# Altium PCB Ad_Fpga.PcbDoc (part 7 of 8)
Units mil, origin at the board's own origin, x right, y up, seen from the top; angles counter-clockwise.
Board outline 5995 x 3921.26 mil, 6 copper layers (Top Layer, GND, Mid-Layer 1, Mid-Layer 2, VCC, Bottom Layer); 476 components, 538 nets, 2139 pads, 1047 vias.
Unrouted connection lines stored in the file: 2.
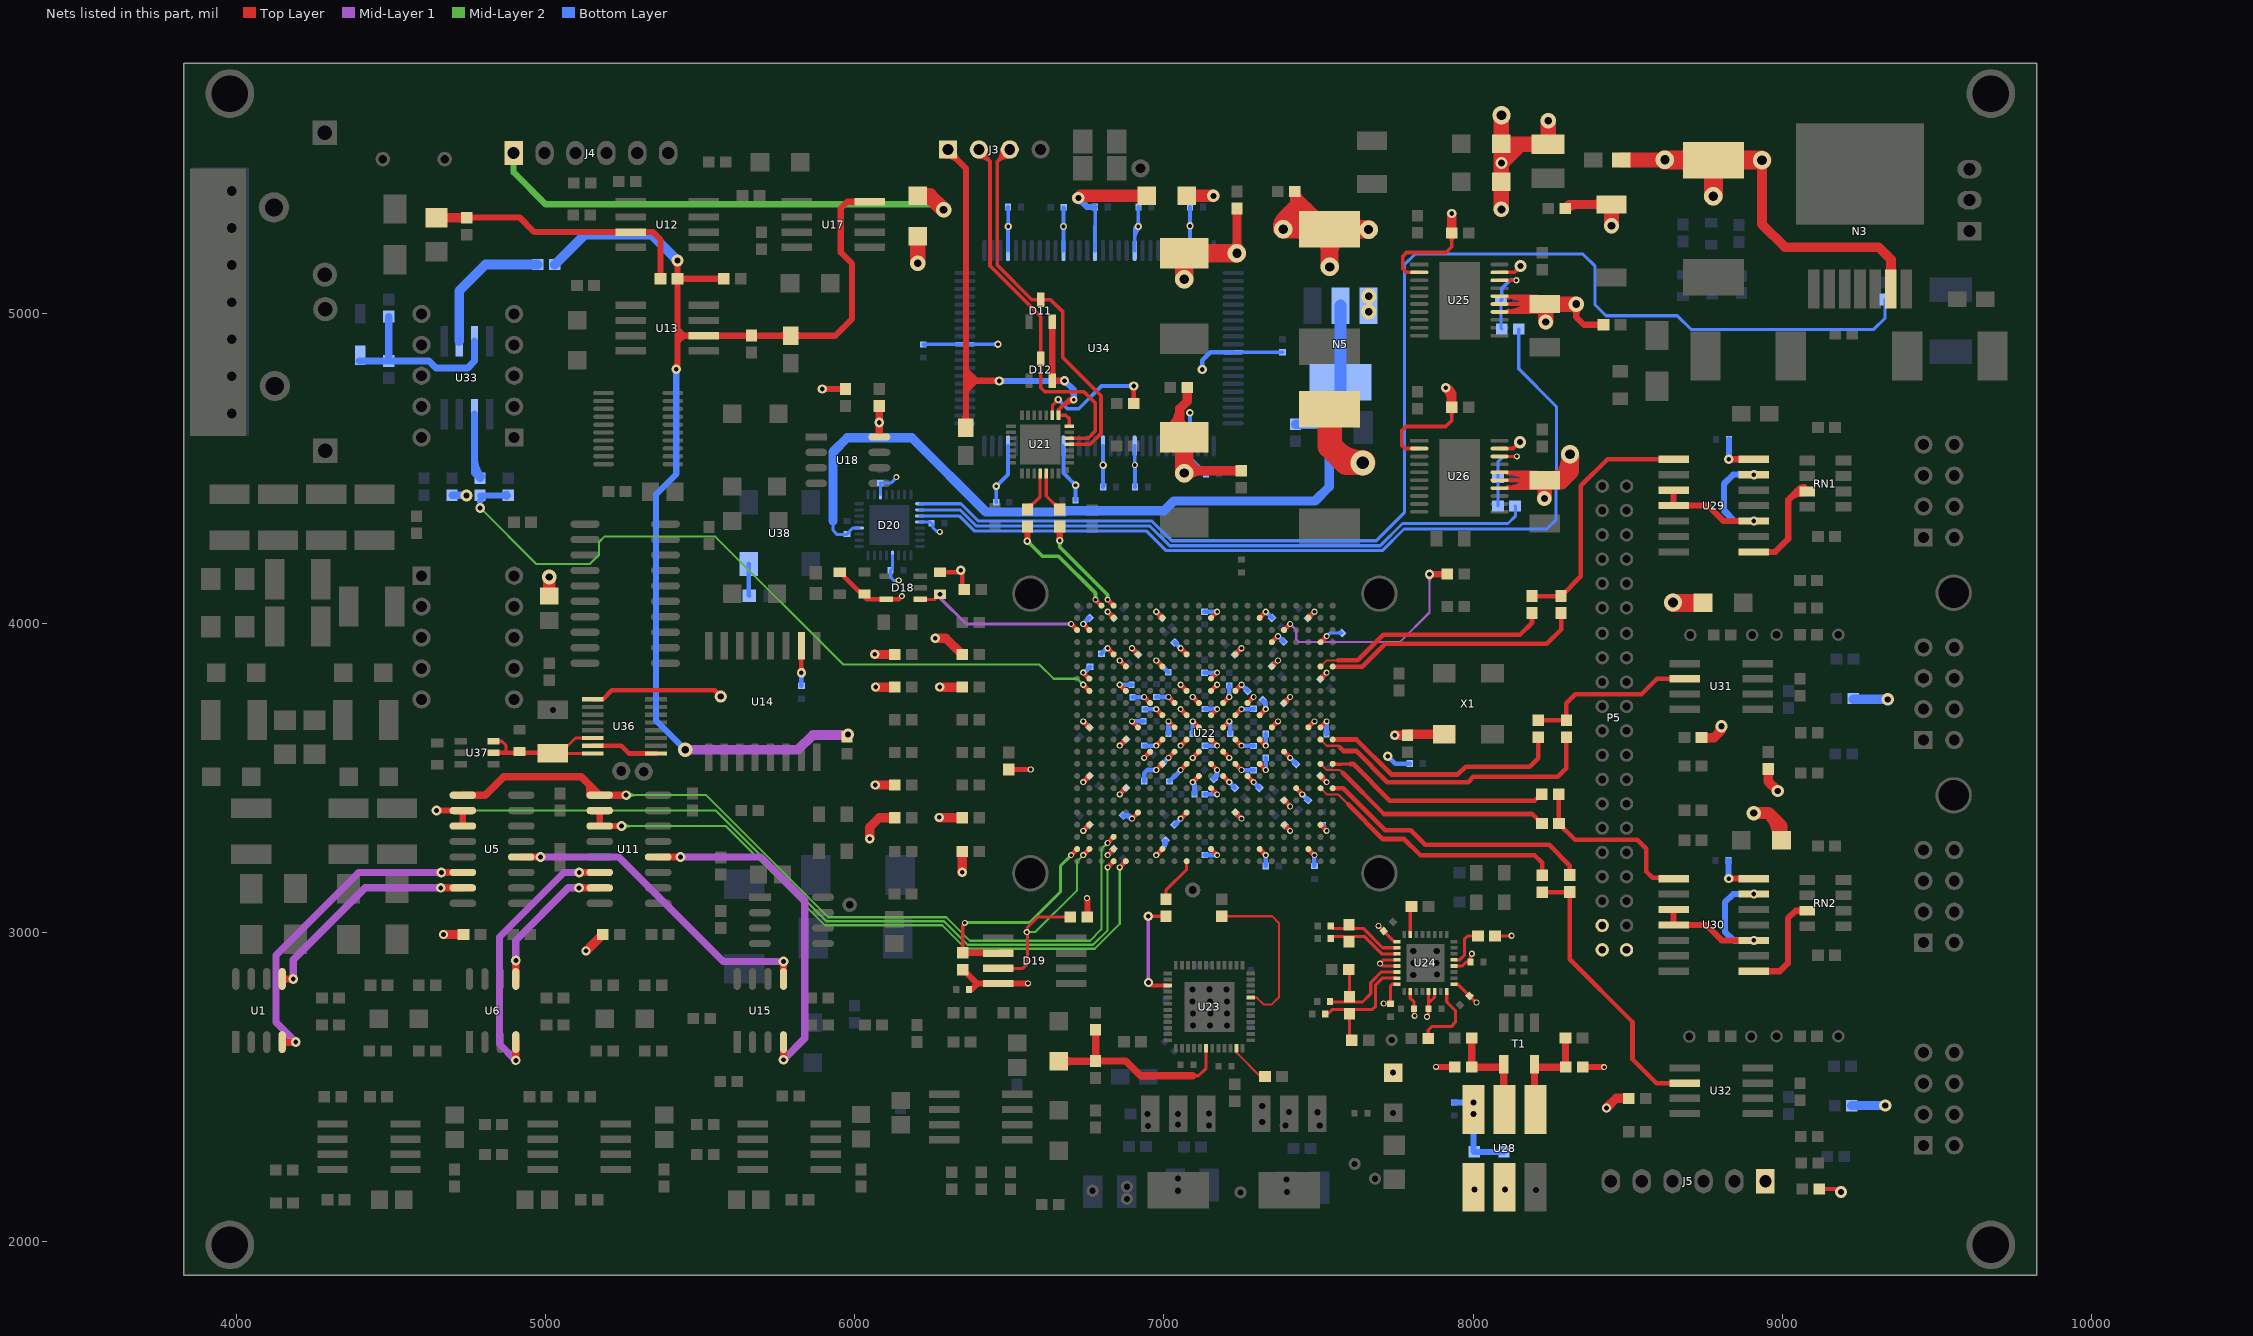
[diagram p11: the nets of this part, all layers, seen from the top]

## Via types
v1: diameter 19.68, hole 11.81, Top Layer to Bottom Layer, 523 vias
v2: diameter 50, hole 25, Top Layer to Bottom Layer, 162 vias
v3: diameter 30, hole 15, Top Layer to Bottom Layer, 100 vias
v4: diameter 39.37, hole 19.68, Top Layer to Bottom Layer, 75 vias
v5: diameter 31.5, hole 15.75, Top Layer to Bottom Layer, 44 vias
v6: diameter 40, hole 20, Top Layer to Bottom Layer, 38 vias
v7: diameter 24, hole 12, Top Layer to Bottom Layer, 33 vias
v8: diameter 47.24, hole 23.62, Top Layer to Bottom Layer, 24 vias
v9: diameter 59.06, hole 31.5, Top Layer to Bottom Layer, 10 vias
v10: diameter 60, hole 30, Top Layer to Bottom Layer, 9 vias
v11: diameter 25.98, hole 12.99, Top Layer to Bottom Layer, tented top, 9 vias
v12: diameter 23.62, hole 11.81, Top Layer to Bottom Layer, 8 vias
v13: diameter 50, hole 27.56, Top Layer to Bottom Layer, 4 vias
v14: diameter 51.18, hole 27.56, Top Layer to Bottom Layer, 2 vias
v15: diameter 39.37, hole 23.62, Top Layer to Bottom Layer, 2 vias
v16: diameter 80, hole 40, Top Layer to Bottom Layer, 1 vias
v17: diameter 47.24, hole 19.68, Top Layer to Bottom Layer, 1 vias
v18: diameter 47.24, hole 27.56, Top Layer to Bottom Layer, 1 vias
v19: diameter 22.05, hole 11.81, Top Layer to Bottom Layer, 1 vias

## Nets (pads, with @x,y where several pads share a name; then routed paths per layer and width w, separated by ;. In a path a pad name is that pad's centre, name@x,y a point inside that pad or via, vN(x,y) a via of type N, cw(c..) or ccw(c..) an arc to the next point about the centre after c; other vN are vias at no path point) (continued)
NetR73_2: R73.2 U21.25 | length 183.1
  Top Layer w10: R73.2@6558,4367 6599.51,4408.51 U21.25@6599.51,4483.57 ; R73.2@6558,4381 ccw(c6558,4414.8) 6581.9,4390.9 ; R73.2@6571,4368 cw(c6599.97,4368) 6579.49,4388.49
NetR76_2: R76.2 U21.26 | length 184
  Top Layer w10: U21.26@6619.2,4483.57 6619.2,4410.8 R76.2@6663,4367 ; 6639.1,4390.9 ccw(c6663,4414.8) R76.2@6663,4381 ; 6641.51,4388.49 cw(c6621.03,4368) R76.2@6650,4368
NetR79_1: R79.1 U21.9 | length 663.1
  Top Layer w10: U21.9@6638.88,4672.54 6638.88,4703.88 v12(6658,4723) ; 6646.37,4711.37 cw(c6658,4699.75) 6658,4716.19 ccw(c6658,4699.75) 6646.37,4711.37 ; 6646.37,4711.37 ccw(c6634.75,4723) 6651.19,4723 cw(c6634.75,4723) 6646.37,4711.37
  Top Layer w15: R79.1@6894.58,4717.42 ccw(c6876.65,4735.35) 6902,4735.35 ccw(c6927.35,4735.35) R79.1@6909.42,4717.42 ; R79.1@6902,4710 v3(6902,4767) ; 6902,4748.89 cw(c6920.11,4748.89) 6907.3,4761.7 ccw(c6920.11,4748.89) 6902,4748.89 ; 6902,4748.89 ccw(c6883.89,4748.89) 6896.7,4761.7 cw(c6883.89,4748.89) 6902,4748.89
  Bottom Layer w12: v12(6658,4723) 6688,4693 6724,4693 6798,4767 v3(6902,4767) ; 6667.92,4713.08 cw(c6677.84,4723) 6663.81,4723 ccw(c6677.84,4723) 6667.92,4713.08 ; 6667.92,4713.08 ccw(c6658,4703.16) 6658,4717.19 cw(c6658,4703.16) 6667.92,4713.08 ; 6880.27,4767 cw(c6880.27,4745.27) 6895.64,4760.64 ccw(c6880.27,4745.27) 6880.27,4767 ; 6880.27,4767 ccw(c6880.27,4788.73) 6895.64,4773.36 cw(c6880.27,4788.73) 6880.27,4767
NetR81_2: R81.2 U23.35 | length 138.4
  Top Layer w7: U23.35@7235.01,2624 7235.01,2609.82 7312.57,2532.26 R81.2@7327.1,2532.26
NetR85_2: R85.2 U22.N22 | length 151.6
  Top Layer w10: R85.2@7007,3106 7006,3107 7006,3135 7073.56,3202.56 U22.N22@7073.56,3229.23
NetR87_2: R87.2 U24.15 | length 97.8
  Top Layer w12: U24.15@7796.94,2991.84 7796.94,3066.94 R87.2@7813,3083
NetR92_2: R92.2 U24.5 | length 140.5
  Top Layer w10: U24.5@7937.84,2909.94 7956.94,2909.94 7973,2926 7973,2978 7982,2987 R92.2@8016,2987
NetR93_1: R93.1 U24.32 | length 237.4
  Top Layer w10: R93.1@7855,2656 7855,2683 7866,2694 7929,2694 7943,2708 7943,2746 7915.04,2773.96 U24.32@7915.04,2808.44
NetR94_1: R94.1 U22.E3 | length 908.1
  Top Layer w15: U22.E3@7388.52,3977.26 v1(7408.21,3996.95)
  Top Layer w20: v3(7859,4158) R94.1@7917,4158 ; R94.1@7910.34,4152.34 ccw(c7896.69,4138.69) 7896.69,4158 ccw(c7896.69,4177.31) R94.1@7910.34,4163.66
  Mid-Layer 1 w7: v1(7408.21,3996.95) 7428,3977.15 7428,3947 7437,3938 7763,3938 7859,4034 v3(7859,4158) ; 7419.03,3986.12 cw(c7429.86,3996.95) 7414.55,3996.95 ccw(c7429.86,3996.95) 7419.03,3986.12 ; 7419.03,3986.12 ccw(c7408.21,3975.29) 7408.21,3990.6 cw(c7408.21,3975.29) 7419.03,3986.12 ; 7859,4130.24 cw(c7886.76,4130.24) 7867.13,4149.87 ccw(c7886.76,4130.24) 7859,4130.24 ; 7859,4130.24 ccw(c7831.24,4130.24) 7850.87,4149.87 cw(c7831.24,4130.24) 7859,4130.24
NetR96_2: R96.2 U22.A6 | length 842.6
  Top Layer w15: U22.A6@7546,3859.15 7547.15,3858 7641,3858 7716,3933 8239,3933 8285,3979 R96.2@8285,4032
NetR97_2: R97.2 U22.A12 | length 800.7
  Top Layer w15: U22.A12@7546,3622.93 7623.07,3622.93 7736,3510 7951,3510 7976,3535 8183,3535 8211,3563 R97.2@8211,3630
NetR98_2: R98.2 U22.A14 | length 735.9
  Top Layer w10: U22.A14@7546,3544.19 7547.16,3543.03 7574.32,3543.03 7575.48,3544.19 7602.81,3544.19 7603,3544
  Top Layer w15: 7603,3544 7612,3544 7731,3425 8199,3425 8221,3447 R98.2@8222,3446
NetR99_2: R99.2 U22.A16 | length 900.7
  Top Layer w15: U22.A16@7546,3465.45 7580.55,3465.45 7716,3330 7798,3330 7824,3304 7846,3282 8246,3282 8313,3215 R99.2@8313,3185
NetR101_2: R101.2 R103.1 T1.5 U28.5 | length 345.8
  Top Layer w23.62: R101.2@7996,2657 R103.1@7996,2563 8095,2563 T1.5@8099,2559 ; T1.5@8099,2571.84 T1.5@8099,2559 ; U28.5@8102,2425.98 8099,2428.98 T1.5@8099,2559
NetR102_1: R102.1 R104.2 T1.4 U28.4 | length 343.8
  Top Layer w23.62: T1.4@8199,2571.84 T1.4@8199,2560 ; U28.4@8202,2425.98 8199,2428.98 T1.4@8199,2560 ; R104.2@8299,2657 8299,2564 R102.1@8300,2563 8202,2563 T1.4@8199,2560
NetR105_1: pad.0@8005,2167 R105.1 U28.1 | length 64.8
  Bottom Layer w19.68: pad.0@8002,2170 8004,2172 R105.1@8004,2234.02
NetR115_2: R115.2 R116.1 U33.3 Z1.2 | length 601.1
  Bottom Layer w23.62: Z1.2@4395.93,4848 R116.1@4492,4848 ; R115.2@4492,4992 R116.1@4492,4848 ; U33.3@4769.43,4912.22 4769.43,4847.43 4747,4825 4645,4825 4622,4848 R116.1@4492,4848
NetR118_1: R118.1 U33.6 | length 275.8
  Bottom Layer w23.62: 4769.43,4527.69 ccw(c4846.24,4527.69) R118.1@4791.92,4473.38 ; U33.6@4769.43,4676 4769.43,4486.12 R118.1@4787.55,4468
NetR120_2: R120.2 U33.2 | length 451.9
  Bottom Layer w31.5: U33.2@4720.21,4912.22 4720.21,5075.21 4805,5160 R120.2@4974,5160
NetR121_2: R121.2 U23.44 | length 544
  Top Layer w7: R121.2@7187,3051 7350,3051 7372,3029 7372,2789 7349,2766 7322,2766 7300.2,2787.8 U23.44@7280.71,2787.8
NetR132_2: R132.2 U22.B6 | length 774.1
  Top Layer w7: U22.B6@7506.63,3859.15 7526.48,3879 7563,3879
  Top Layer w15: 7563,3879 7627,3879 7710,3962 8152,3962 8191,4001 R132.2@8191,4032
NetR133_2: R133.2 U22.B12 | length 971.1
  Top Layer w7: U22.B12@7506.63,3622.93 7526.56,3603 7564,3603 7570,3597
  Top Layer w15: 7570,3597 7581,3586 7622,3586 7723,3485 7984,3485 8001,3502 8274,3502 8302,3530 R133.2@8302,3630
NetR134_2: R134.2 U22.B14 | length 799.2
  Top Layer w7: U22.B14@7506.63,3544.19 7526.66,3524.16 7554.01,3524.16 7554.17,3524 7570,3524 7578,3516
  Top Layer w15: 7578,3516 7712,3382 7808,3382 7817,3382 8192,3382 R134.2@8223,3351 R134.2@8221,3349
NetR135_2: R135.2 U22.B16 | length 857.4
  Top Layer w7: U22.B16@7506.63,3465.45 7526.66,3445.42 7554.01,3445.42 7554.43,3445 7564,3445 7596,3413
  Top Layer w15: 7596,3413 7708,3301 7778,3301 7830,3249 8199,3249 8224,3224 R135.2@8224,3184
NetR136_1: pad.0@8103,2167 R136.1 U28.2 | length 64.8
  Bottom Layer w19.68: pad.0@8098,2170 8100,2172 R136.1@8100,2234.02
NetR152_2: R152.2 R153.2 U26.18 | length 267.3
  Top Layer w10: U26.18@8085.84,4538.82 8141.82,4538.82 v1(8142,4539)
  Bottom Layer w10: R152.2@8081,4379 R153.2@8081,4471 8081,4522 8098,4539 v1(8142,4539)
NetR154_2: R154.2 R155.2 U25.18 | length 244.9
  Top Layer w12: U25.18@8085.84,5108.82 8139.82,5108.82 v1(8140,5109)
  Bottom Layer w10: R154.2@8090.84,5043.28 8090.84,4953.28 R155.2@8092.84,4951.28
  Bottom Layer w12: R154.2@8090.84,5043.28 8093,5045.43 8093,5082 8120,5109 v1(8140,5109)
NetR156_1: R156.1 U38.3 | length 103.6
  Bottom Layer w15: U38.3@5657,4191 5657,4089.5 R156.1@5658.5,4088
NetRN1_3: RN1.3 U29.8 | length 404.7
  Top Layer w20: U29.8@8908.84,4230 8978,4230 9020,4272 9020,4399 ; 9053.66,4432.66 cw(c9071.39,4414.93) RN1.3@9071.64,4440 ; RN1.3@9071.44,4420 ccw(c9070.71,4348.3) 9020,4399 ; RN1.3@9081,4426 9047,4426 9020,4399
NetRN2_3: RN2.3 U30.8 | length 338.3
  Top Layer w20: U30.8@8908.84,2873 8993,2873 9019,2899 9019,3044 9044,3069 RN2.3@9081,3069
NetU1_4: U1.4 U5.14 | length 1067
  Top Layer w23.62: U1.4@4147,2644 v5(4191,2644) ; v5(4662,3193) U5.14@4731.51,3193
  Mid-Layer 1 w23.62: v5(4191,2644) 4127,2708 4127,2925 4395,3193 v5(4662,3193)
NetU1_5: U1.5 U5.15 | length 743.1
  Top Layer w23.62: U1.5@4147,2848.25 4182.75,2848.25 v5(4183,2848) ; v5(4660,3143) U5.15@4731.51,3143
  Mid-Layer 1 w23.62: v5(4183,2848) 4183,2910 4416,3143 v5(4660,3143)
NetU5_4: U5.4 U15.5 | length 1045.3
  Top Layer w23.62: U5.4@4920.49,3243 v5(4983,3243) ; U15.5@5769,2848.25 v5(5769,2905)
  Mid-Layer 1 w23.62: v5(4983,3243) 5236,3243 5574,2905 v5(5769,2905)
NetU6_4: U6.4 U11.14 | length 891
  Top Layer w23.62: v5(4903,2585) U6.4@4903,2644 ; v5(5108,3193) U11.14@5174.51,3193
  Mid-Layer 1 w23.62: v5(4903,2585) 4850,2638 4850,2984 5059,3193 v5(5108,3193)
NetU6_5: U6.5 U11.15 | length 466.7
  Top Layer w23.62: U6.5@4903,2848.25 v5(4903,2908) ; v5(5107,3143) U11.15@5174.51,3143
  Mid-Layer 1 w23.62: v5(4903,2908) 4903,2973 5073,3143 v5(5107,3143)
NetU11_4: U11.4 U15.4 | length 1132.9
  Top Layer w23.62: U11.4@5363.49,3243 v5(5436,3243) ; v5(5769,2587) U15.4@5769,2644
  Mid-Layer 1 w23.62: v5(5436,3243) 5696,3243 5838,3101 5838,2656 v5(5769,2587)
NetU29_3: U29.3 U29.4 U29.10 U29.13 | length 636.7
  Top Layer w20: U29.3@8649,4430 U29.4@8649,4380 8761,4380 8811,4330 v3(8908.84,4330)
  Bottom Layer w20: v3(8908.84,4330) 8846,4330 8812,4364 8812,4450 8842,4480 v3(8908.84,4480)
NetU30_3: U30.3 U30.4 U30.10 U30.13 | length 636
  Top Layer w20: U30.3@8649,3073 U30.4@8649,3023 8754,3023 8804,2973 v3(8908.84,2973)
  Bottom Layer w20: v3(8908.84,2973) 8843,2973 8815,3001 8815,3096 8842,3123 v3(8908.84,3123)
OPRX1: R99.1 R135.1 U32.6 | length 915.1
  Top Layer w15: R135.1@8224,3129 8312,3129 R99.1@8313,3130 8313,2912 8516,2709 8516,2589 8593.69,2511.31 U32.6@8684.38,2511.31
OPRX2: R97.1 R133.1 U31.6 | length 561.2
  Top Layer w15: R97.1@8211,3685 R133.1@8302,3685 8302,3740 8331,3769 8545,3769 8595.31,3819.31 U31.6@8684.38,3819.31
OPRXTAP4: U22.C11 | length 27.8
  Top Layer w15: U22.C11@7467.26,3662.3 v1(7486.95,3681.99)
OPTX1: R98.1 R134.1 U30.1 | length 613.9
  Top Layer w15: R98.1@8277,3446 8277,3352 R134.1@8278,3351 8330,3299 8531,3299 8561,3269 8561,3196 8581,3176 8646,3176 U30.1@8649,3173 U30.1@8680,3173
OPTX2: R96.1 R132.1 U29.1 | length 813.1
  Top Layer w15: R132.1@8191,4087 R96.1@8285,4087 8349,4151 8349,4444 8435,4530 U29.1@8649,4530
OR: R85.1 U23.15 | length 334.2
  Top Layer w12: v3(6949.16,3051) R85.1@7007,3051 ; v3(6950,2837) 6959.8,2827.2 U23.15@7012.11,2827.2
  Mid-Layer 1 w12: v3@6949.16,2840.84 v3(6949.16,3051)
OUT0_N: C62.2 R86.2 R90.1 U24.23 | length 409.2
  Top Layer w10: C62.2@7521.7,2734.98 7530.98,2734.98 7546,2750 7629,2750 7675,2750 7685,2760 7685,2829.94 7706,2850.94 U24.23@7754.44,2850.94 ; R86.2@7600,2736 7600,2650 R90.1@7601,2649
OUT0_P: C63.2 R86.1 R89.1 U24.22 | length 368.1
  Top Layer w10: C63.2@7536.7,2774.98 7537.68,2774 7641,2774 7642.37,2774 7669,2800.63 7669,2836.57 7703.07,2870.64 U24.22@7754.44,2870.64 ; R89.1@7598,2879 7600,2877 R86.1@7600,2791
OUT1_N: C60.2 R88.2 U24.19 | length 240.9
  Top Layer w10: C60.2@7539.62,2979.39 7546.23,2986 7648,2986 7704.36,2929.64 U24.19@7754.44,2929.64
OUT1_P: C61.2 R88.1 U24.18 | length 243.9
  Top Layer w10: C61.2@7539.6,3019.61 7547.32,3011.88 7621,3011.88 7644.74,3011.88 7707.29,2949.34 U24.18@7754.44,2949.34
POWER_1.8V_CTRL: D20.3 R155.1 | length 2814.9
  Bottom Layer w10: D20.3@6210.43,4346.53 6337.22,4346.53 6385.75,4298 6943,4298 7007,4234 7706.63,4234 7776.63,4304 8239,4304 8269,4334 8269,4448 8270,4449 8270,4700 8147.84,4822.16 R155.1@8147.84,4951.28
POWER_3.3V_CTRL: D20.2 R152.1 | length 2048.7
  Bottom Layer w10: D20.2@6210.43,4366.21 6340.16,4366.21 6392.37,4314 6954.37,4314 7018.37,4250 7700,4250 7772,4322 8113,4322 8138,4347 8138,4377 R152.1@8136,4379
POWER_5V_CTRL: D20.1 R151.2 | length 4276.6
  Bottom Layer w10: D20.1@6210.43,4385.9 6343.1,4385.9 6399,4330 6961,4330 7025,4266 7687,4266 7778,4357 7778,5159 7813,5194 8355,5194 8395,5154 8395,5029 8430,4994 8661,4994 8705,4950 9297,4950 9333,4986 R151.2@9333,5047
PVAMPIN+: C14.2 R32.2 R34.2 U12.3 | length 912.1
  Top Layer w20: R32.2@4744.09,5310.91 4745.19,5312 4916,5312 4963,5265 U12.3@5275.09,5265 ; U12.3@5275.4,5264.69 5347.31,5264.69 5371,5241 R34.2@5371,5114 ; R34.2@5365.34,5119.66 ccw(c5351.69,5133.31) 5371,5133.31 ccw(c5390.31,5133.31) R34.2@5376.66,5119.66
  Top Layer w31.5: C14.2@4645.67,5311.02 4645.79,5310.91 R32.2@4744.09,5310.91
PVBH: R118.2 R119.1 U22.AA8 | length 2498.8
  Top Layer w15: v1(6738.91,3800.1) U22.AA8@6758.6,3780.41
  Mid-Layer 2 w7: v5(4787.55,4372.45) 4969,4191 5142,4191 5172,4221 5172,4262 5189.34,4279.34 5548.66,4279.34 5962,3866 6596.62,3866 6643.18,3819.44 6719.57,3819.44 v1(6738.91,3800.1) ; 6728.08,3810.92 cw(c6717.26,3800.1) 6732.57,3800.1 ccw(c6717.26,3800.1) 6728.08,3810.92 ; 6728.08,3810.92 ccw(c6738.91,3821.75) 6738.91,3806.44 cw(c6738.91,3821.75) 6728.08,3810.92
  Bottom Layer w19.68: 4787.55,4392.31 cw(c4807.24,4392.31) R118.2@4793.32,4406.23 ; R118.2@4787.55,4413 R119.1@4878.32,4413 ; R119.1@4872.55,4407.23 ccw(c4858.63,4393.31) 4858.63,4413 ccw(c4858.63,4432.69) R119.1@4872.55,4418.77
R1.25V: C220.1 C222.1 U36.6 U36.8 U37.5 U37.6 | length 540.4
  Top Layer w10: U37.6@4831.15,3617.4 4857.6,3617.4 4871,3604 4871,3580 ; C220.1@5022,3580 C220.1@5023,3579 ; U36.8@5152,3578 5024,3578 C220.1@5023,3579 ; U36.6@5152,3628 5096,3628 5047,3579 C220.1@5023,3579
  Top Layer w15: U37.5@4831.15,3580 4871,3580 C220.1@5022,3580
REF2V5: C37.2 R34.1 R41.1 R43.1 R120.1 R146.1 U13.6 U17.8 | length 4273.4
  Top Layer w20: v3@5418.46,4824.54 ccw(c5400.27,4842.73) 5426,4842.73 ; v4@5419.15,5166.15 cw(c5402.62,5149.62) 5426,5149.62 cw(c5449.38,5149.62) v4@5432.85,5166.15 ; R34.1@5420.34,5108.34 cw(c5406.69,5094.69) 5426,5094.69 cw(c5445.31,5094.69) R34.1@5431.66,5108.34 ; R34.1@5420.34,5119.66 ccw(c5406.69,5133.31) 5426,5133.31 ccw(c5445.31,5133.31) R34.1@5431.66,5119.66 ; v3(5422,4821) 5426,4825 5426,4909.39 ; v4(5426,5173) R34.1@5426,5114 ; R34.1@5432.66,5108.34 cw(c5446.31,5094.69) 5446.31,5114 cw(c5446.31,5133.31) R34.1@5432.66,5119.66 ; R41.1@5569.34,5108.34 ccw(c5555.69,5094.69) 5555.69,5114 ccw(c5555.69,5133.31) R41.1@5569.34,5119.66 ; R41.1@5575.9,5110 R41.1@5576,5110 ; R41.1@5576,5114 R34.1@5426,5114 ; 5644.95,4929.69 ccw(c5644.95,4950.05) R43.1@5659.34,4935.66 ; 5646.43,4929.69 cw(c5646.43,4911.43) R43.1@5659.34,4924.34 ; R43.1@5670.66,4924.34 cw(c5683.57,4911.43) 5683.57,4929.69 ; R43.1@5670.66,4935.66 ccw(c5685.05,4950.05) 5685.05,4929.69 ; 5755.05,4929.69 ccw(c5755.05,4966.95) C37.2@5781.39,4940.61 ; 5756.53,4929.69 cw(c5756.53,4894.53) C37.2@5781.39,4919.39 ; C37.2@5792,4930 C37.2@5791.69,4929.69 ; C37.2@5802.61,4919.39 cw(c5827.47,4894.53) 5827.47,4929.69 ; C37.2@5802.61,4940.61 ccw(c5828.95,4966.95) 5828.95,4929.69 ; U17.8@6047.62,5363.12 5975.12,5363.12 5954,5342 5954,5199 5991,5162 5991,4985 5935.69,4929.69 C37.2@5791.69,4929.69 ; 5426,4909.39 5446.31,4929.69 ; 5426,4909.39 5426,4950 ; 5426,4950 R34.1@5426,5114 ; 5426,4950 5446.31,4929.69 ; 5446.31,4929.69 U13.6@5511.62,4929.69 C37.2@5791.69,4929.69
  Mid-Layer 1 w31.5: v8(5451,3590) 5816,3590 5864,3638 5976,3638 5977,3637 5978,3638 v4(5978,3639)
  Bottom Layer w20: v3(5422,4821) 5422,4482 5357,4417 5357,3684 v8(5451,3590)
  Bottom Layer w31.5: R120.1@5029,5160 5125,5256 5343,5256 v4(5426,5173)
SHT_DATA: D19.2 R137.2 U22.AB21 | length 725.8
  Top Layer w10: R137.2@6349,2933 6349,3023 v1(6356,3030)
  Top Layer w15: v1(6699.54,3248.91) U22.AB21@6719.23,3268.6
  Top Layer w20: R137.2@6349,2933 6463.31,2933 D19.2@6464.4,2931.91
  Mid-Layer 2 w10: v1@6357,3031 6566,3031 6665,3130 6665,3214.37 v1(6699.54,3248.91)
SHT_SCK: D19.3 R138.2 U22.AA21 | length 738.9
  Top Layer w10: D19.3@6464.4,2882.69 6542.69,2882.69 6558,2898 6558,3015 6592,3049 R138.2@6697,3049
  Top Layer w15: v1(6738.91,3248.91) U22.AA21@6758.6,3268.6
  Mid-Layer 2 w7: v1(6556,3000) 6584,3000 6719,3135 6719,3229 v1(6738.91,3248.91)
SWAB1: U5.10 U5.11 U22.W22 | length 2808.3
  Top Layer w15: v1(6817.65,3209.54) U22.W22@6837.34,3229.23
  Top Layer w20: v5(4646,3393) U5.10@4731.51,3393 U5.11@4731.51,3343
  Mid-Layer 2 w7: v5(4646,3393) 5550.38,3393 5908.38,3035 6288.38,3035 6364.38,2959 6770.62,2959 6817.65,3006.04 v1(6817.65,3209.54) ; v5@4654.66,3384.34 cw(c4675.57,3363.43) 4675.57,3393 cw(c4675.57,3422.57) v5@4654.66,3401.66 ; v1@6813.17,3205.06 cw(c6802.34,3194.23) 6817.65,3194.23 cw(c6832.96,3194.23) v1@6822.14,3205.06
SWAB2: U11.10 U11.11 U22.V22 | length 2211.4
  Top Layer w15: v1(6857.02,3209.54) U22.V22@6876.71,3229.23
  Top Layer w20: U11.10@5174.51,3393 U11.11@5174.51,3343 v5(5245,3343)
  Mid-Layer 2 w7: v5(5245,3343) 5582,3343 5903,3022 6283,3022 6359,2946 6776,2946 6857.02,3027.02 v1(6857.02,3209.54) ; v5@5253.66,3334.34 cw(c5274.57,3313.43) 5274.57,3343 cw(c5274.57,3372.57) v5@5253.66,3351.66 ; v1@6852.54,3205.06 cw(c6841.71,3194.23) 6857.02,3194.23 cw(c6872.33,3194.23) v1@6861.51,3205.06
SWC: U5.9 U11.9 U22.W20 | length 2813.2
  Top Layer w15: v1(6817.65,3288.28) U22.W20@6837.34,3307.97
  Top Layer w23.62: U5.9@4731.51,3443 4804,3443 4864,3503 5114.51,3503 5142,3475.51 ; U11.9@5143.02,3443 ccw(c5125.2,3458.72) 5142,3475.51 ; v5(5260,3443) U11.9@5174.51,3443 ; 5142,3475.51 U11.9@5174.51,3443 ; 5142,3475.51 5142,3443 U11.9@5174.51,3443
  Mid-Layer 2 w7: v5(5260,3443) 5518.77,3443 5913.77,3048 6296,3048 6372,2972 6761,2972 6797.62,3008.62 6797.62,3268.25 v1(6817.65,3288.28) ; v5@5268.66,3434.34 cw(c5289.57,3413.43) 5289.57,3443 cw(c5289.57,3472.57) v5@5268.66,3451.66 ; v1@6811.31,3288.28 cw(c6796,3288.28) 6806.82,3277.45 cw(c6817.65,3266.63) v1@6817.65,3281.94
SYS_RST#: D18.1 R149.1 U22.AB3 | length 568.6
  Top Layer w10: D18.1@6211.9,4076.35 6258.35,4076.35 v5(6275,4093)
  Top Layer w15: v1(6699.54,3996.95) U22.AB3@6719.23,3977.26
  Mid-Layer 1 w10: v5(6275,4093) 6275,4081.95 6360,3996.95 v1(6699.54,3996.95)
UD+: D11.3 J3.3 U21.4 | length 1350.1
  Top Layer w12: J3.3@6475.49,5530.06 cw(c6425.93,5528.08) 6461,5493 ; J3.3@6498.06,5507.49 ccw(c6496.08,5457.93) 6461,5493 ; J3.3@6499,5531 6461,5493 ; D11.3@6596.89,5041.89 ccw(c6586.97,5031.97) 6586.97,5046 ccw(c6586.97,5060.03) D11.3@6596.89,5050.11 ; D11.3@6605.11,5041.89 cw(c6615.03,5031.97) 6615.03,5046 cw(c6615.03,5060.03) D11.3@6605.11,5050.11 ; U21.4@6694,4578.06 6760.51,4578.06 6796,4613.54 6796,4735 6673,4858 6673,5006 6633,5046 D11.3@6601,5046 6572.46,5046 6461,5157.46 6461,5493
UD-: D12.3 J3.2 U21.5 | length 1362
  Top Layer w12: J3.2@6399,5531 6437,5493 ; J3.2@6399.94,5507.49 cw(c6401.92,5457.93) 6437,5493 ; J3.2@6422.51,5530.06 ccw(c6472.07,5528.08) 6437,5493 ; D12.3@6596.89,4838.51 cw(c6586.97,4828.59) 6601,4828.59 cw(c6615.03,4828.59) D12.3@6605.11,4838.51 ; D12.3@6596.89,4870.35 ccw(c6586.97,4880.27) 6601,4880.27 ccw(c6615.03,4880.27) D12.3@6605.11,4870.35 ; U21.5@6694,4597.74 6754.74,4597.74 6778,4621 6778,4711.54 6741.6,4747.94 6614.06,4747.94 6601,4761 D12.3@6601,4854.43 6601,4992 6437,5156 6437,5493
  Top Layer w15: D12.3@6601,4854.43 D12.3@6601.51,4854.94
URXD: R73.1 U22.Y1 | length 461.7
  Top Layer w15: v1(6778.28,4075.69) U22.Y1@6797.97,4056
  Top Layer w20: R73.1@6552.34,4305.34 cw(c6538.69,4291.69) 6558,4291.69 cw(c6577.31,4291.69) R73.1@6563.66,4305.34 ; v7(6558,4265) R73.1@6558,4312
  Mid-Layer 2 w12: v7(6558,4265) 6607,4216 6659,4216 6778.28,4096.72 v1(6778.28,4075.69) ; 6568.24,4254.76 cw(c6578.49,4265) 6564,4265 ccw(c6578.49,4265) 6568.24,4254.76 ; 6568.24,4254.76 ccw(c6558,4244.51) 6558,4259 cw(c6558,4244.51) 6568.24,4254.76
USB5V: C46.1 D11.2 D12.2 J3.1 U21.7 U21.8 | length 2133.4
  Top Layer w12: U21.8@6658.47,4682.39 cw(c6675.58,4682.39) 6663.48,4694.48 ; 6681.99,4709.03 ccw(c6673.12,4742.14) v7@6702.8,4725 ; U21.7@6694,4637.11 6694,4661 6682.46,4672.54 U21.8@6658.57,4672.54 6658.57,4689.57 6691,4722 v7(6708,4722) ; 6693.51,4722 cw(c6693.51,4707.51) 6703.76,4717.76 ccw(c6693.51,4707.51) 6693.51,4722 ; 6693.51,4722 ccw(c6693.51,4736.49) 6703.76,4726.24 cw(c6693.51,4736.49) 6693.51,4722 ; 6668.74,4699.74 cw(c6708,4660.47) 6708,4716 ccw(c6708,4660.47) 6668.74,4699.74 ; 6689.22,4720.22 cw(c6708,4701.44) 6708,4728 ccw(c6708,4701.44) 6689.22,4720.22
  Top Layer w20: J3.1@6299,5511.47 cw(c6299,5464.33) 6332.34,5497.66 cw(c6365.67,5531) J3.1@6318.53,5531 ; J3.1@6299,5531 6359,5471 6359,4817.57 ; C46.1@6348.39,4647.61 ccw(c6322.79,4673.21) 6359,4673.21 ccw(c6395.21,4673.21) C46.1@6369.61,4647.61 ; C46.1@6359,4632 6359,4752 ; 6359,4819 6359,4817.57 ; v3(6467,4783) 6466.43,4783.57 6393,4783.57 ; D11.2@6638.4,4975.13 D12.2@6638.4,4783.57 6677.57,4783.57 v3(6678,4784) ; 6359,4752 6359,4783 ; 6359,4752 6390.57,4783.57 ; 6359,4783 6359,4817.57 ; 6359,4783 6359.57,4783.57 6390.57,4783.57 ; 6359,4817.57 6393,4783.57 ; 6390.57,4783.57 6393,4783.57
  Bottom Layer w20: v3(6467,4783) 6677,4783 v3(6678,4784) 6708,4754 v7(6708,4722)
UTXD: R76.1 U22.W1 | length 404.1
  Top Layer w15: v1(6817.65,4075.69) U22.W1@6837.34,4056
  Top Layer w20: R76.1@6657.34,4305.34 cw(c6643.69,4291.69) 6663,4291.69 cw(c6682.31,4291.69) R76.1@6668.66,4305.34 ; v7(6663,4267) R76.1@6663,4312
  Mid-Layer 2 w12: v7(6663,4267) 6663,4246 6817.65,4091.35 v1(6817.65,4075.69) ; 6663,4252.51 cw(c6677.49,4252.51) 6667.24,4262.76 ccw(c6677.49,4252.51) 6663,4252.51 ; 6663,4252.51 ccw(c6648.51,4252.51) 6658.76,4262.76 cw(c6648.51,4252.51) 6663,4252.51
VCC: 
VCC1V2: C56.1 C57.1 C59.2 C75.1 C142.2 C145.2 C146.2 C153.2 C154.2 C156.2 C163.1 C164.2 C165.2 C166.2 C167.2 C172.2 C173.2 C174.2 C175.2 L28.1 U22.J8 U22.J10 U22.J12 U22.J14 U22.K9 U22.K11 U22.K13 U22.L10 U22.L12 U22.L14 U22.M9 U22.M11 U22.M13 U22.N10 U22.N12 U22.N14 U22.P9 U22.P11 U22.P13 U22.R14 U26.2 | length 3115.5
  Top Layer w12: U26.2@7826,4564.41 7780.59,4564.41 7769,4576 7769,4622 7783,4636 7912,4636 7931,4655 C75.1@7931,4698 ; C75.1@7922.51,4689.51 cw(c7902.03,4669.03) 7931,4669.03 cw(c7959.97,4669.03) C75.1@7939.49,4689.51
  Top Layer w15: v1(6975.13,3524.5) U22.R14@6994.82,3544.19 ; v1(7014.5,3563.87) U22.P13@7034.19,3583.56 ; v1(7014.5,3681.99) U22.P11@7034.19,3662.3 ; v1(7014.5,3760.73) U22.P9@7034.19,3741.04 ; v1(7053.87,3524.5) U22.N14@7073.56,3544.19 ; v1(7053.87,3603.24) U22.N12@7073.56,3622.93 ; v1(7053.87,3721.36) U22.N10@7073.56,3701.67 ; v1(7093.24,3563.87) U22.M13@7112.93,3583.56 ; v1(7093.24,3681.99) U22.M11@7112.93,3662.3 ; v1(7093.24,3760.73) U22.M9@7112.93,3741.04 ; U22.L14@7152.3,3544.19 v1(7171.99,3524.5) ; U22.L12@7152.3,3622.93 v1(7171.99,3603.24) ; U22.L10@7152.3,3701.67 v1(7171.99,3721.36) ; U22.K13@7191.67,3583.56 v1(7211.36,3563.87) ; U22.K11@7191.67,3662.3 v1(7211.36,3681.99) ; U22.K9@7191.67,3741.04 v1(7211.36,3760.73) ; U22.J14@7231.04,3544.19 v1(7250.73,3524.5) ; U22.J12@7231.04,3622.93 v1(7250.73,3603.24) ; U22.J10@7231.04,3701.67 v1(7250.73,3721.36) ; U22.J8@7231.04,3780.41 v1(7250.73,3800.1)
  Top Layer w30: C57.1@7017.04,4628.95 ccw(c6972.37,4693.66) 7051,4693.66 ; C57.1@7035.24,4634.99 ccw(c7034.65,4651.33) 7051,4651.33 ; v10(7066,4485) 7074,4493 7109,4493 ; 7066,4536 7109,4493 ; C57.1@7066,4600.8 7066,4636.33 7051,4651.33 ; C56.1@7075,4762 7075,4717.67 7051,4693.67 ; C59.2@7250,4493 7109,4493 ; C75.1@7931,4698 7931,4742 v3(7912,4761) ; 7051,4651.33 7051,4693.67 ; 7109,4493 7121.53,4493 ; 7121.53,4493 ccw(c7121.53,4429.47) 7076.61,4474.39 cw(c7121.53,4429.47) 7121.53,4493 ; v3(7912,4761) cw(c7866.13,4715.13) 7931,4715.13 ccw(c7866.13,4715.13) v3(7912,4761) ; v3(7912,4761) cw(c7902.5,4734.13) 7931,4734.13 ccw(c7902.5,4734.13) v3(7912,4761) ; C57.1@7051,4648.32 ccw(c7084,4648.32) 7060.66,4624.99 cw(c7084,4648.32) C57.1@7051,4648.32 ; C75.1@7927.4,4699.5 ccw(c7905.16,4712.34) 7929.97,4718.98 cw(c7905.16,4712.34) C75.1@7927.4,4699.5
  Top Layer w60: v10(7066,4485) 7066,4536 C57.1@7066,4600.8
  Top Layer w80: L28.1@7536,4692 7536,4573 7590,4519 7644,4519 v16(7643,4518) ; v16(7643,4518) cw(c7643,4643.54) 7554.23,4554.77 ccw(c7643,4643.54) v16(7643,4518)
  Bottom Layer w15: C146.2@6936.3,3488.98 6936.3,3514.3 6946.5,3524.5 v1(6975.13,3524.5) ; C142.2@6976.02,3760.3 6976.44,3760.73 v1(7014.5,3760.73) ; C145.2@6995.5,3544.53 7014.5,3563.53 v1(7014.5,3563.87) ; C154.2@7014.3,3641.98 7014.5,3642.19 v1(7014.5,3681.99) ; C156.2@7017.98,3487.7 7053.87,3523.59 v1(7053.87,3524.5) ; v1(7093.24,3681.99) 7093.24,3642.04 C153.2@7093.3,3641.98 ; C166.2@7132.98,3602.7 7133.53,3603.24 v1(7171.99,3603.24) ; C163.1@7133.02,3721.7 7171.64,3721.7 v1(7171.99,3721.36) ; C167.2@7160.45,3497.02 ccw(c7133.47,3524.5) v1(7171.99,3524.5) 7171.99,3505.01 C167.2@7161.5,3494.53 ; v1@7209.7,3680.33 cw(c7197.63,3668.26) 7214.7,3668.26 ; v1(7211.36,3681.99) 7214.7,3678.64 C165.2@7214.7,3641.98 ; v1(7211.36,3760.73) C164.2@7211.36,3797.64 ; v1(7250.73,3524.5) 7251.93,3523.3 C174.2@7289.98,3523.3 ; v1(7250.73,3721.36) 7288.64,3721.36 C173.2@7289.98,3722.7 ; v1(7250.73,3800.1) 7250.93,3800.1 C172.2@7270.53,3780.5 ; v1@7251.3,3603.82 v1(7250.73,3603.24) 7289.04,3603.24 C175.2@7289.98,3602.3
VCC1V8: C227.2 C228.1 C229.1 D20.20 N5.2 N5.4 | length 2822.1
  Bottom Layer w10: 5929,4331 5929,4300 5943,4286 5972.32,4286 C227.2@5974.02,4287.7 5993.48,4307.16 D20.20@6013.57,4307.16
  Bottom Layer w30: 5929,4331 5929,4553 5975,4599 6184,4599 6424.02,4358.98 6679.25,4358.98 6683.27,4363 7000,4363 7032,4395 7489,4395 7534.88,4440.88 C229.1@7534.88,4633 7530,4633 7520,4643 C228.1@7426,4643
  Bottom Layer w40: C229.1@7532,4635.88 7532,4700 7571,4739 N5.4@7571,4778.26 N5.2@7571,5026.29
VCC3V3: C43.1 C54.1 C58.1 C65.2 C74.1 C110.2 C121.2 C122.2 C123.2 C124.2 C125.2 C126.2 C128.2 C129.2 C130.2 C131.2 C132.2 C133.2 C134.2 C135.2 C136.2 C139.2 C140.2 C141.2 C143.2 C144.2 C147.2 C148.2 C155.2 C160.2 C161.2 C162.2 C168.2 C169.2 C170.2 C176.2 C177.2 C180.2 C181.2 C182.2 C183.2 C184.2 C185.2 C186.2 C187.2 C188.2 C189.2 C190.2 C191.2 C192.2 C193.2 C194.2 C195.2 C196.2 C197.2 C198.2 C199.2 C200.2 C204.2 C205.2 C206.2 C207.2 C208.2 C209.2 C210.2 C211.2 C215.1 C216.2 C223.2 C224.2 C225.2 C226.2 D18.5 D19.4 D20.4 D20.12 D20.27 J4.1 J5.1 L10.2 L22.2 L26.2 L27.1 L29.2 L33.1 L34.1 N5.3 P5.1 P5.2 P5.3 pad.0@5566,3762 pad.0@7741,2545 pad.0@8001,2412 pad.0@8001,2449 R23.1 R33.1 R44.2 R47.2 R48.2 R51.2 R55.2 R60.2 R67.1 R68.2 R70.1 R71.1 R92.1 R102.2 R103.2 R105.2 R107.2 R108.2 R117.2 R127.1 R130.1 R136.2 R137.1 R138.1 R143.1 R149.2 R150.2 U14.2 U18.8 U22.AA3 U22.AA7 U22.AA11 U22.AA15 U22.AA19 U22.B4 U22.B7 U22.B11 U22.B15 U22.B19 U22.C2 U22.C21 U22.D16 U22.E9 U22.E13 U22.E17 U22.E19 U22.F4 U22.F6 U22.F11 U22.G2 U22.G10 U22.G12 U22.G14 U22.G21 U22.H9 U22.H15 U22.J5 U22.J18 U22.K15 U22.L2 U22.L7 U22.L8 U22.L16 U22.L21 U22.M15 U22.N5 U22.N8 U22.N18 U22.R2 U22.R6 U22.R10 U22.R12 U22.R21 U22.T9 U22.T13 U22.U5 U22.U11 U22.U18 U22.V6 U22.V8 U22.V12 U22.V16 U22.W2 U22.W5 U22.W21 U24.1 U24.4 U24.17 U24.20 U24.21 U24.24 U24.26 U24.29 U24.30 U25.2 U28.6 U29.14 U30.14 U36.1 U36.7 U36.9 X1.4 | length 13598.4
  Top Layer w10: v1(7694,3020) C206.2@7711.15,3002.9 ; v1@7698,2898 v1(7699,2898) ; v1(7711,2769) 7710,2769 7710.78,2768.22 C200.2@7733.14,2768.22 7733.14,2825.86 7733,2826 7738.24,2831.24 U24.24@7754.44,2831.24 ; C206.2@7711.15,3002.9 7745.01,2969.04 U24.17@7754.44,2969.04 ; U24.21@7754.44,2890.34 7706.66,2890.34 v1(7699,2898) ; U24.20@7754.44,2909.94 7711.06,2909.94 7711,2910 v1(7699,2898) ; U24.26@7796.94,2808.44 7796.94,2786.06 7809.3,2773.7 C199.2@7809.3,2751.98 7809.3,2728.3 7809,2728 7810,2728 v1(7811,2729) ; v1(7851,2726) 7855,2730 7856,2730 7855.7,2730.3 C208.2@7855.7,2752.02 7855.94,2752.26 7855.94,2770 ; U24.29@7855.94,2808.44 7855.94,2770 ; U24.30@7875.64,2808.44 7875.64,2789.7 7855.94,2770 ; U24.1@7937.84,2831.24 7950.58,2831.24 C205.2@7987.92,2793.9 8008.82,2773 8010,2773 v1(8011,2772) ; U24.4@7937.84,2890.34 7965.34,2890.34 7978.02,2903.02 C198.2@7991.7,2903.02 7991.7,2925.7 v1(7996,2930) ; R92.1@8071,2987 8124,2987 v1(8125,2988)
  Top Layer w12: U25.2@7826,5134.41 7784.59,5134.41 7773,5146 7773,5187 7785,5199 7913,5199 7931,5217 C74.1@7931,5262 ; C74.1@7922.51,5253.51 cw(c7902.03,5233.03) 7931,5233.03 cw(c7959.97,5233.03) C74.1@7939.49,5253.51
  Top Layer w15: U36.7@5152,3603 5244,3603 5269,3578 U36.9@5356.72,3578 ; U36.1@5152,3753 5185,3753 5214,3782 5546,3782 pad.0@5566,3762 ; v3(5827,3839) U14.2@5827,3926 ; R150.2@5951,4163.87 6038.52,4076.35 D18.5@6101.66,4076.35 6141.35,4076.35 v1(6152,4087) ; R149.2@6275,4163.87 6344.13,4163.87 v3@6347,4166.73 ; v3(6342.73,4171) v3@6347,4166.73 ; R60.2@6347,4108 v3@6347,4166.73 ; R143.1@6498,3526 v1(6569,3526) ; v1(6738.91,3327.65) U22.AA19@6758.6,3347.34 ; v1(6738.91,3485.13) U22.AA15@6758.6,3504.82 ; v1(6738.91,3681.99) U22.AA11@6758.6,3662.3 ; v1(6738.91,3839.47) U22.AA7@6758.6,3819.78 ; v1(6738.91,3996.95) U22.AA3@6758.6,3977.26 ; v1(6817.65,3248.91) U22.W21@6837.34,3268.6 ; v1(6817.65,3918.21) U22.W5@6837.34,3898.52 ; v1(6817.65,4036.32) U22.W2@6837.34,4016.63 ; v1(6857.02,3445.76) U22.V16@6876.71,3465.45 ; v1(6857.02,3603.24) U22.V12@6876.71,3622.93 ; v1(6857.02,3800.1) U22.V8@6876.71,3780.41 ; v1(6857.02,3878.84) U22.V6@6876.71,3859.15 ; v1(6896.39,3367.02) U22.U18@6916.08,3386.71 ; v1(6896.39,3681.99) U22.U11@6916.08,3662.3 ; v1(6896.39,3918.21) U22.U5@6916.08,3898.52 ; v1(6935.76,3563.87) U22.T13@6955.45,3583.56 ; v1(6935.76,3760.73) U22.T9@6955.45,3741.04 ; v1(6975.13,3248.91) U22.R21@6994.82,3268.6 ; v1(6975.13,3603.24) U22.R12@6994.82,3622.93 ; v1(6975.13,3721.36) U22.R10@6994.82,3701.67 ; v1(6975.13,3878.84) U22.R6@6994.82,3859.15 ; v1(6975.13,4036.32) U22.R2@6994.82,4016.63 ; v1(7053.87,3367.02) U22.N18@7073.56,3386.71 ; v1(7053.87,3800.1) U22.N8@7073.56,3780.41 ; v1(7053.87,3918.21) U22.N5@7073.56,3898.52 ; v1(7093.24,3485.13) U22.M15@7112.93,3504.82 ; U22.L21@7152.3,3268.6 v1(7171.99,3248.91) ; U22.L16@7152.3,3465.45 v1(7171.99,3445.76) ; U22.L8@7152.3,3780.41 v1(7171.99,3800.1) ; U22.L7@7152.3,3819.78 v1(7171.99,3839.47) ; U22.L2@7152.3,4016.63 v1(7171.99,4036.32) ; U22.K15@7191.67,3504.82 v1(7211.36,3485.13) ; U22.J18@7231.04,3386.71 v1(7250.73,3367.02) ; U22.J5@7231.04,3898.52 v1(7250.73,3918.21) ; U22.H15@7270.41,3504.82 v1(7290.1,3485.13) ; U22.H9@7270.41,3741.04 v1(7290.1,3760.73) ; U22.G21@7309.78,3268.6 v1(7329.47,3248.91) ; U22.G14@7309.78,3544.19 v1(7329.47,3524.5) ; U22.G12@7309.78,3622.93 v1(7329.47,3603.24) ; U22.G10@7309.78,3701.67 v1(7329.47,3721.36) ; U22.G2@7309.78,4016.63 v1(7329.47,4036.32) ; U22.F11@7349.15,3662.3 v1(7368.84,3681.99) ; U22.F6@7349.15,3859.15 v1(7368.84,3878.84) ; U22.F4@7349.15,3937.89 v1(7368.84,3957.58) ; U22.E19@7388.52,3347.34 v1(7408.21,3327.65) ; U22.E17@7388.52,3426.08 v1(7408.21,3406.39) ; U22.E13@7388.52,3583.56 v1(7408.21,3563.87) ; U22.E9@7388.52,3741.04 v1(7408.21,3760.73) ; U22.D16@7427.89,3465.45 v1(7447.58,3445.76) ; U22.C21@7467.26,3268.6 v1(7486.95,3248.91) ; U22.C2@7467.26,4016.63 v1(7486.95,4036.32) ; U22.B19@7506.63,3347.34 v1(7526.32,3327.65) ; U22.B15@7506.63,3504.82 v1(7526.32,3485.13) ; U22.B11@7506.63,3662.3 v1(7526.32,3681.99) ; U22.B7@7506.63,3819.78 v1(7526.32,3839.47) ; U22.B4@7506.63,3937.89 v1(7526.32,3957.58) ; 5827,3857.11 cw(c5808.89,3857.11) 5821.7,3844.3 ccw(c5808.89,3857.11) 5827,3857.11 ; 5827,3857.11 ccw(c5845.11,3857.11) 5832.3,3844.3 cw(c5845.11,3857.11) 5827,3857.11
  Top Layer w19.68: R137.1@6349,2878 6351,2878 6396,2833 ; C216.2@6369.7,2813.98 6376.98,2813.98 6396,2833 ; v1(6560,2834) 6559.48,2833.48 D19.4@6464.4,2833.48 6463.92,2833 6396,2833 ; v1(6751,3110) 6752,3109 R138.1@6752,3049 ; v1(7880,2564) 7880,2563 R103.2@7941,2563 ; R102.2@8355,2563 v1(8424,2563)
  Top Layer w20: v3(5894,4757) R44.2@5970,4757 ; R44.2@5964.34,4751.34 ccw(c5950.69,4737.69) 5950.69,4757 ccw(c5950.69,4776.31) R44.2@5964.34,4762.66 ; v3(8827,3173) U30.14@8908.84,3173 ; v3(8827,4530) U29.14@8908.84,4530
  Top Layer w23.62: C43.1@6079,4702 6079,4602.25 U18.8@6079.25,4602
  Top Layer w30: v3(4669,2992) R23.1@4734,2992 ; v3(5130,2939) 5131,2939 R33.1@5184,2992 ; v3(6048,3302) 6048,3339 6079,3370 R55.2@6129,3370 ; v3(6064,3899) 6065,3898 R47.2@6129,3898 ; v3(6066,3476) R51.2@6129,3476 ; v3(6067,3793) 6067.5,3792.5 R48.2@6129,3792.5 ; v3(6260,3951) 6294,3951 R67.1@6347,3898 ; v3(6273,3371) 6274,3370 R70.1@6347,3370 ; v3(6275,3793) 6275.5,3792.5 R68.2@6347,3792.5 ; v3(6347,3194) R71.1@6347,3261 ; v10@7225.39,5206.61 ccw(c7199.79,5232.21) 7236,5232.21 ccw(c7272.21,5232.21) v10@7246.61,5206.61 ; v10(7236,5196) C58.1@7236,5341 ; L27.1@7446,5274 7504,5274 L27.1@7536,5274 ; C74.1@7931,5262 v3(7931,5325) ; v3(8432,2431) 8463,2462 R107.2@8504,2462 ; R108.2@8739,3629 8780,3629 8804,3653 v4(8804,3666) ; 8786.81,3635.81 ccw(c8756.62,3666) v4@8799.32,3666
  Top Layer w31.5: v10@7369.14,5270.4 cw(c7415.72,5280.35) 7382.04,5314.04 ; v10@7375.92,5284.08 ccw(c7351.59,5308.41) 7386,5308.41 ccw(c7420.41,5308.41) v10@7396.08,5284.08 ; v10(7386,5274) v10@7386,5277.5 ; v10@7399.94,5276.98 cw(c7483.21,5294.78) 7423,5355 ; v10@7400.25,5274 cw(c7443.11,5274) 7412.8,5304.3 ; C65.2@7423,5396 C65.2@7423,5387 ; C65.2@7426.25,5396 ccw(c7455.83,5396) 7434.92,5375.08 ; 7435.28,5342.72 ccw(c7496.63,5404.07) L27.1@7496.63,5317.31 ; L27.1@7453.38,5276.16 ccw(c7349.37,5281.36) 7423,5355 ; L27.1@7454.22,5282.75 ccw(c7341.94,5305.93) C65.2@7423,5387 ; L27.1@7455.22,5286.68 ccw(c7409.27,5300.76) 7443.25,5334.75 ; 7464.31,5345.69 cw(c7410.42,5291.79) L27.1@7485.06,5276.39 ; L27.1@7492.45,5317.1 cw(c7486.54,5378.03) 7443.25,5334.75 ; L27.1@7504,5274 7483.75,5294.25 7443.25,5294.25 7443.25,5334.75 ; L27.1@7536,5274 C65.2@7423,5387 ; v3(7747,3637) C215.1@7788,3637 7791,3640 X1.4@7907,3640 X1.4@7904,3637 ; v10@7386,5277.5 7386,5318 7423,5355 ; v10@7386,5277.5 7443.25,5334.75 ; 7423,5355 7443.25,5334.75 ; 7423,5355 C65.2@7423,5387
  Top Layer w39.37: L10.2@5011,4087.37 v8(5011,4149) ; v8(8908,3385) 8956,3385 ; L34.1@8987.72,3297.9 ccw(c8878.42,3307.42) 8956,3385 ; L34.1@8998,3297 8998,3343 8956,3385
  Top Layer w40: L26.2@7074,5382 v6(7160,5382)
  Top Layer w50: L22.2@6203,5382 6242,5382 v2(6287,5337)
  Top Layer w59.06: v10(7386,5274) L27.1@7446,5274 ; L27.1@7475.75,5253.12 ccw(c7425.34,5202.71) 7425.34,5274 ccw(c7425.34,5345.29) L27.1@7475.75,5294.88 ; L27.1@7515.12,5253.12 cw(c7464.71,5202.71) 7536,5202.71 cw(c7607.29,5202.71) L27.1@7556.88,5253.12 ; v10(7536,5152) L27.1@7536,5274 7661,5274 v10(7662,5273) ; L27.1@7596.25,5253.12 cw(c7646.66,5202.71) 7646.66,5274 cw(c7646.66,5345.29) L27.1@7596.25,5294.88 ; v9(8647,4066) 8648,4065 L33.1@8744,4065
  Top Layer w60: v10(7066,5112) C54.1@7066,5195.8 7235.8,5195.8 v10(7236,5196)
  Mid-Layer 2 w20: J4.1@4895.9,5520.46 4895.9,5458.1 4999,5355 6269,5355 v2(6287,5337)
  Bottom Layer w10: D20.27@6082.47,4415.43 6082.47,4452.24 C224.2@6082.02,4452.7 6115.7,4452.7 6135,4472 v1(6134,4472) ; D20.12@6121.84,4218.57 6121.84,4177.13 C226.2@6115.7,4170.98 6115.7,4147.3 6125,4138 v1(6142,4138) ; D20.4@6210.43,4326.84 6243.84,4326.84 6251,4319.68 6251,4310 6264,4297 6273,4297 v1(6275,4295) ; v1(6975.13,3248.91) 7005.5,3279.28 C148.2@7005.5,3296.47 ; v1@6975.13,3253.75 ccw(c6975.13,3265.45) 6983.4,3257.18 ccw(c6991.67,3248.91) v1@6979.97,3248.91 ; 6984.1,3257.88 ccw(c6946.22,3295.77) C148.2@6999.8,3295.77 ; 7001.17,3274.95 ccw(c6980.36,3295.77) C148.2@7009.8,3295.77 ; C148.2@7001.26,3292.23 cw(c6991.02,3281.99) 7005.5,3281.99 ; C148.2@7005.5,3285.4 cw(c7015.16,3285.4) C148.2@7008.33,3292.23 ; v1(7526.32,3957.58) 7536.24,3967.5 C204.2@7575.47,3967.5 ; 7560.99,3967.5 ccw(c7560.99,3981.98) C204.2@7571.23,3971.74 ; C204.2@7564.4,3967.5 cw(c7564.4,3957.84) C204.2@7571.23,3964.67 ; 7534.58,3965.84 cw(c7526.32,3974.11) 7526.32,3962.42 ccw(c7526.32,3974.11) 7534.58,3965.84 ; 7534.58,3965.84 ccw(c7542.85,3957.58) 7531.16,3957.58 cw(c7542.85,3957.58) 7534.58,3965.84
  Bottom Layer w15: C110.2@5826.98,3796.7 v3(5827,3839) ; v1(6738.91,3327.65) 6757.79,3346.53 C126.2@6758.5,3346.53 ; v1(6738.91,3485.13) 6739.16,3485.13 C125.2@6758.5,3504.47 ; v1(6738.91,3839.47) 6742.18,3839.47 C123.2@6761.02,3858.3 ; v1(6738.91,3996.95) C121.2@6758.5,4016.53 ; v1@6738.99,3681.99 v1(6738.91,3681.99) 6758.4,3662.5 C124.2@6758.47,3662.5 ; C122.2@6797.98,3900.7 6815.49,3918.21 v1(6817.65,3918.21) ; v1(6817.65,3248.91) 6817.94,3248.91 C136.2@6837.5,3268.47 ; v1(6817.65,4036.32) v1(6817.65,4036.32) C128.2@6837.53,4016.5 ; v1(6857.02,3445.76) 6876.5,3465.24 C134.2@6876.5,3465.53 ; v1(6857.02,3603.24) 6857.22,3603.24 C133.2@6876.5,3622.53 ; v1(6857.02,3800.1) 6895.19,3800.1 C131.2@6895.3,3799.98 ; C135.2@6867.47,3377.5 6885.92,3377.5 v1(6896.39,3367.02) ccw(c6876.26,3346.89) C135.2@6868.83,3374.38 ; C135.2@6867.47,3377.5 cw(c6867.48,3340.81) v1@6894.66,3365.45 ; v1(6896.39,3681.99) C143.2@6934.3,3681.98 ; v1(6896.39,3918.21) 6896.77,3918.21 C129.2@6916.47,3898.5 ; C130.2@6898.7,3760.02 6935.05,3760.02 v1(6935.76,3760.73) ; C144.2@6936.02,3603.3 6975.07,3603.3 v1(6975.13,3603.24) ; C132.2@6937.7,3721.02 6938.04,3721.36 v1(6975.13,3721.36) ; v1(6975.13,3878.84) 6975.85,3878.84 C141.2@7013.98,3840.7 ; v1(6975.13,4036.32) 6975.13,4035.84 C140.2@6994.5,4016.47 ; C147.2@7034.5,3347.53 7053.87,3366.9 v1(7053.87,3367.02) ; C139.2@7034.5,3937.53 7053.82,3918.21 v1(7053.87,3918.21) ; v1@7091.59,3483.48 cw(c7074.42,3466.31) 7098.7,3466.31 ; v1(7093.24,3485.13) 7098.7,3479.68 C155.2@7098.7,3446.02 ; C162.2@7131.02,3839.3 7131.18,3839.47 v1(7171.99,3839.47) ; C160.2@7131.02,4036.7 7131.4,4036.32 v1(7171.99,4036.32) ; C170.2@7132.02,3249.3 7171.6,3249.3 v1(7171.99,3248.91) ; C169.2@7131.98,3445.7 v1@7171.92,3445.7 ; v1(7211.36,3485.13) 7211.36,3484.62 C177.2@7229.5,3466.47 ; C161.2@7230.5,3898.53 7231.05,3898.53 v1(7250.73,3918.21) ; C168.2@7231.47,3386.5 7250.73,3367.25 v1(7250.73,3367.02) ; v1(7290.1,3485.13) 7290.1,3484.88 C176.2@7308.5,3466.47 ; C183.2@7319.47,3748.03 cw(c7295.32,3723.88) v1@7329.47,3723.88 ; C183.2@7320.53,3750.5 7329.47,3741.56 v1(7329.47,3721.36) ; C190.2@7329.3,3214.02 7329.3,3248.75 v1(7329.47,3248.91) ; C186.2@7329.3,3563.98 7329.3,3524.67 v1(7329.47,3524.5) ; C185.2@7329.3,3640.98 7329.3,3603.41 v1(7329.47,3603.24) ; v1(7329.47,4036.32) 7329.66,4036.32 C180.2@7349.5,4016.47 ; C181.2@7349.5,3860.47 7350.47,3860.47 v1(7368.84,3878.84) ; v1(7368.84,3957.58) 7369.4,3957.58 C182.2@7387.47,3939.5 ; C187.2@7388.5,3426.53 7388.5,3426.1 v1(7408.21,3406.39) ; C184.2@7388.5,3741.47 7388.95,3741.47 v1(7408.21,3760.73) ; C189.2@7390.5,3346.53 7390.5,3345.36 v1(7408.21,3327.65) ; v1(7408.21,3563.87) 7427.47,3544.61 C188.2@7427.47,3544.5 ; v1(7447.58,3445.76) 7466.47,3426.86 C195.2@7466.47,3426.5 ; C191.2@7466.5,4016.53 7467.16,4016.53 v1(7486.95,4036.32) ; C197.2@7486.7,3214.02 7486.7,3248.67 v1(7486.95,3248.91) ; C192.2@7506.5,3819.47 7506.5,3819.65 v1(7526.32,3839.47) ; C194.2@7506.53,3504.5 7506.95,3504.5 v1(7526.32,3485.13) ; C196.2@7513.02,3346.3 7513.02,3340.95 v1(7526.32,3327.65) ; C196.2@7516.52,3346.3 ccw(c7537.88,3346.3) v1@7522.77,3331.19 ; C193.2@7525.7,3640.98 7525.7,3681.37 v1(7526.32,3681.99) ; v3(7724,3569) 7748.02,3544.98 C207.2@7795.3,3544.98 ; v3@5821.7,3833.7 cw(c5808.93,3820.93) 5826.98,3820.93 ccw(c5808.93,3820.93) v3@5821.7,3833.7 ; 5826.98,3820.85 cw(c5845.15,3820.85) 5832.3,3833.7 ccw(c5845.15,3820.85) 5826.98,3820.85 ; v1@6738.91,3841.81 ccw(c6738.91,3855.36) 6748.49,3845.78 cw(c6738.91,3855.36) v1@6738.91,3841.81
  Bottom Layer w19.68: C209.2@7938.98,2448.7 7939.28,2449 pad.0@8001,2449 pad.0@8001,2412 8001,2292.02 R105.2@8004,2289.02 R136.2@8100,2289.02
  Bottom Layer w20: C211.2@8826.7,3232.02 8826.7,3173.3 v3(8827,3173) ; v3(8827,4530) 8827.7,4530.7 C210.2@8827.7,4594.02
  Bottom Layer w23.62: R117.2@4696.77,4413 v4(4743,4413)
  Bottom Layer w30: R130.1@9225,2439 v6(9334,2439) ; R127.1@9230,3753 v6(9342,3753)
  Bottom Layer w39.37: pad.0@8000.7,2448.7 pad.0@8001,2449
  other v2: 7663,5007 7663,5057
  other v5: 6079,4649
VCC5V: C77.1 C79.1 C81.1 C82.1 C83.1 C84.1 L30.2 L31.2 L32.2 N3.6 R106.2 R109.1 R110.1 U25.14 U25.15 U25.16 U25.19 U26.14 U26.15 U26.16 U26.19 | length 6170.4
  Top Layer w12: U26.14@8085.84,4436.46 8206.36,4436.46 C81.1@8232,4462 ; U26.15@8085.84,4462.05 C81.1@8232,4462 ; U26.16@8085.84,4487.64 8206.36,4487.64 C81.1@8232,4462 ; U26.19@8085.84,4564.41 8129.41,4564.41 8151,4586 v4(8152,4585) ; U25.14@8085.84,5006.46 8206.36,5006.46 C79.1@8232,5032 ; U25.15@8085.84,5032.05 C79.1@8232,5032 ; U25.16@8085.84,5057.64 8206.36,5057.64 C79.1@8232,5032 ; U25.19@8085.84,5134.41 8118,5134.41 8133.41,5134.41 v4(8154,5155) ; U26.16@8093.62,4487.64 cw(c8093.62,4343.3) 8195.68,4445.36 ccw(c8155.4,4405.09) 8155.4,4462.05 ; U25.16@8093.62,5057.64 cw(c8093.62,4913.3) 8195.68,5015.36 ccw(c8155.4,4975.09) 8155.4,5032.05 ; U26.14@8093.85,4436.46 ccw(c8093.85,4580.47) 8195.68,4478.64 cw(c8155.63,4518.69) 8155.63,4462.05 ; U25.14@8093.85,5006.46 ccw(c8093.85,5150.47) 8195.68,5048.64 cw(c8155.63,5088.69) 8155.63,5032.05 ; U26.14@8109.39,4436.51 cw(c8118.09,4430.76) 8116,4440.98 ; U26.16@8109.39,4487.59 ccw(c8118.24,4493.43) 8116.11,4483.04 ; U25.14@8109.39,5006.51 cw(c8118.09,5000.76) 8116,5010.98 ; U25.16@8109.39,5057.59 ccw(c8118.24,5063.43) 8116.11,5053.04 ; 8122.59,4487.64 cw(c8122.59,4372.28) C81.1@8204.16,4453.85 ; 8122.59,5057.64 cw(c8122.59,4942.28) C79.1@8204.16,5023.85 ; 8122.82,4436.46 ccw(c8122.82,4551.5) C81.1@8204.16,4470.15 ; 8122.82,5006.46 ccw(c8122.82,5121.5) C79.1@8204.16,5040.15 ; 8151.56,4487.64 cw(c8151.56,4401.25) C81.1@8212.65,4462.33 ; 8151.56,5057.64 cw(c8151.56,4971.25) C79.1@8212.65,5032.33 ; 8151.79,4436.46 ccw(c8151.79,4522.53) C81.1@8212.65,4461.67 ; 8151.79,5006.46 ccw(c8151.79,5092.53) C79.1@8212.65,5031.67 ; 8180.53,4487.64 cw(c8180.53,4430.22) C81.1@8221.13,4470.82 ; 8180.53,5057.64 cw(c8180.53,5000.22) C79.1@8221.13,5040.82 ; 8180.76,4436.46 ccw(c8180.76,4493.56) C81.1@8221.13,4453.18 ; 8180.76,5006.46 ccw(c8180.76,5063.56) C79.1@8221.13,5023.18 ; C81.1@8232,4462 C81.1@8232,4462 ; C79.1@8232,5032 C79.1@8232,5032 ; R109.1@9120,2169 9180,2169 9190,2159 v4(9191,2159)
  Top Layer w20: v2@8323.39,5021.39 cw(c8297.79,4995.79) 8334,4995.79 cw(c8370.21,4995.79) v2@8344.61,5021.39 ; v2(8334,5032) 8334,4990 8359,4965 R106.2@8422,4965 ; R106.2@8415.34,4959.34 ccw(c8401.69,4945.69) 8401.69,4965 ccw(c8401.69,4984.31) R106.2@8415.34,4970.66
  Top Layer w30: C82.1@8298,5341 8311.22,5354.22 C84.1@8448,5354.22 ; C82.1@8301.12,5338.88 cw(c8338.16,5301.84) 8338.16,5354.22 ; C84.1@8418.04,5343.95 ccw(c8393.24,5319.15) 8393.24,5354.22 ccw(c8393.24,5389.29) C84.1@8418.04,5364.49
  Top Layer w31.5: v9@8935,5498 v9(8935,5497) 8935,5290 9009,5216 9312,5216 9352,5176 N3.6@9352,5080.78 ; R110.1@8955,3528 8955,3487 v4(8986,3456)
  Top Layer w47.24: v8@8232,4404 C81.1@8232,4462
  Top Layer w50: v2(8092,5338) L31.2@8092,5427 v15(8092,5488.5) ; v9(8092,5643) L30.2@8092,5550 ; 8161,5549.12 8152.62,5549.12 ; v8(8235,4974) 8235,5029 C79.1@8232,5032 v2(8334,5032) ; v2(8243,5625) C77.1@8243,5549.12 8152.62,5549.12 ; v2(8448,5285) C84.1@8448,5354.22 ; C83.1@8479,5498 v10@8620,5498 ; v15(8092,5488.5) L30.2@8092,5550 ; v15(8092,5488.5) 8152.62,5549.12 ; L30.2@8092,5550 8092.88,5549.12 8152.62,5549.12
  Top Layer w59.06: C81.1@8232,4462 C81.1@8232,4462 8284.05,4462.05 ; C81.1@8251.69,4462 ccw(c8251.69,4540.01) 8306.85,4484.85 ; 8284.05,4462.05 ccw(c8210.49,4535.61) v9(8314,4546) ; 8284.05,4462.05 ccw(c8210.49,4535.61) v9(8314,4546) ; 8284.05,4462.05 8314,4492 v9(8314,4546)
  Top Layer w60: v10(8621,5499) 8620,5498 L32.2@8778,5498 ; L32.2@8718.08,5477.45 ccw(c8668.48,5427.85) 8668.48,5498 ccw(c8668.48,5568.15) L32.2@8718.08,5518.55 ; L32.2@8757.45,5477.45 cw(c8707.85,5427.85) 8778,5427.85 cw(c8848.15,5427.85) L32.2@8798.55,5477.45 ; v9(8777,5381) 8778,5382 L32.2@8778,5498 ; L32.2@8837.92,5477.45 cw(c8887.52,5427.85) 8887.52,5498 cw(c8887.52,5568.15) L32.2@8837.92,5518.55 ; v9@8935,5498 L32.2@8778,5498
  Mid-Layer 1 w12: v4(8152,4585) v4@8152,4586
  other v8: 8231,4403
VDD: C113.2 C119.2 C120.2 C179.2 L26.1 U34.15 U34.41 U34.65 U34.91 | length 1345
  Top Layer w40: v6(6723,5375) 6730,5382 L26.1@6944,5382
  Bottom Layer w12: C113.2@6220.98,4900.7 6222.08,4901.8 U34.41@6355.94,4901.8 6462.8,4901.8 v7(6463,4902) ; C113.2@6224.81,4897.87 cw(c6234.29,4888.4) 6234.29,4901.8 ; 6448.02,4901.8 ccw(c6448.02,4916.98) v7@6458.76,4906.24 ; 6449.01,4901.8 cw(c6449.01,4888.01) v7@6458.76,4897.76 ; C119.2@6773.47,5342.15 cw(c6764.23,5332.91) 6777.3,5332.91 ; U34.65@6777.2,5204.94 6777.2,5284.8 6777,5285 6777.3,5285.3 C119.2@6777.3,5345.98 ; U34.15@6802.8,4573.06 6802.8,4511.2 v7(6803,4511) 6803,4440.28 C120.2@6803.3,4439.98 ; 6803,4451.37 ccw(c6813.68,4451.37) C120.2@6806.13,4443.81 ; U34.91@7224.06,4876.2 7383.92,4876.2 C179.2@7384.02,4876.3 ; 6803,4496.51 cw(c6817.49,4496.51) 6807.24,4506.76 ccw(c6817.49,4496.51) 6803,4496.51 ; 6803,4496.51 ccw(c6788.51,4496.51) 6798.76,4506.76 cw(c6788.51,4496.51) 6803,4496.51 ; v7@6798.76,4515.24 ccw(c6789.01,4524.99) 6802.8,4524.99 cw(c6789.01,4524.99) v7@6798.76,4515.24 ; 6802.8,4525.98 ccw(c6817.98,4525.98) 6807.24,4515.24 cw(c6817.98,4525.98) 6802.8,4525.98
  Bottom Layer w15: v3(7124,4820) 7124,4850 7150.2,4876.2 U34.91@7224.06,4876.2 ; 7124,4838.11 cw(c7105.89,4838.11) 7118.7,4825.3 ccw(c7105.89,4838.11) 7124,4838.11 ; 7124,4838.11 ccw(c7142.11,4838.11) 7129.3,4825.3 cw(c7142.11,4838.11) 7124,4838.11
  Bottom Layer w20: v6@6723,5365 cw(c6723,5340.86) 6740.07,5357.93 cw(c6757.14,5375) v6@6733,5375 ; v6(6723,5375) 6752.02,5345.98 C119.2@6776.3,5345.98
VDDQ: C114.2 C115.2 C117.2 C118.2 C127.2 C138.2 C152.2 C159.2 L22.1 U34.4 U34.11 U34.20 U34.27 U34.54 U34.61 U34.70 U34.77 | length 1946.1
  Top Layer w50: v2(6203,5164) L22.1@6203,5252
  Bottom Layer w12: C115.2@6457.3,4390.98 6457.3,4441.7 v7(6457,4442) 6495.71,4480.71 U34.27@6495.71,4573.06 ; v7@6491.76,5278.76 cw(c6482.22,5269.22) 6495.71,5269.22 ; v7@6491.76,5287.24 ccw(c6481.51,5297.49) 6496,5297.49 ccw(c6510.49,5297.49) v7@6500.24,5287.24 ; C114.2@6492.47,5342.15 cw(c6483.96,5333.64) 6496,5333.64 ; C114.2@6495.3,5345.98 6496,5345.28 v7(6496,5283) 6495.71,5282.71 U34.54@6495.71,5204.94 ; 6495.71,5267.81 cw(c6511.19,5267.81) v7@6500.24,5278.76 ; v7@6670.76,5278.76 cw(c6660.9,5268.9) 6674.84,5268.9 ; v7@6670.76,5287.24 ccw(c6660.51,5297.49) 6675,5297.49 ccw(c6689.49,5297.49) v7@6679.24,5287.24 ; U34.20@6674.84,4573.06 6674.84,4485.16 v7(6714,4446) 6713.7,4445.7 C118.2@6713.7,4397.02 ; U34.61@6674.84,5204.94 6674.84,5282.84 v7(6675,5283) C117.2@6675,5344.68 ; 6674.84,5268.13 cw(c6689.87,5268.13) v7@6679.24,5278.76 ; 6675,5332.67 cw(c6687.04,5332.67) C117.2@6678.53,5341.19 ; U34.11@6905.16,4573.06 6905.16,4511.84 v1(6906,4511) 6906.3,4510.7 C127.2@6906.3,4439.98 ; U34.70@6905.16,5204.94 6905.16,5271.16 v7(6917,5283) 6917,5345.68 C138.2@6917.3,5345.98 ; 6905.16,5239.92 cw(c6960.08,5239.92) v7@6921.24,5278.76 ; 6905.16,5268.9 cw(c6931.1,5268.9) 6912.76,5287.24 ccw(c6902.51,5297.49) 6917,5297.49 ccw(c6931.49,5297.49) v7@6921.24,5287.24 ; 6917,5334.6 cw(c6927.68,5334.6) C138.2@6920.13,5342.15 ; v7@7080.05,5280.47 cw(c7069.81,5270.22) 7084.29,5270.22 cw(c7098.78,5270.22) v7@7088.53,5280.47 ; v7@7080.05,5288.95 ccw(c7069.81,5299.19) 7084.29,5299.19 ccw(c7098.78,5299.19) v7@7088.53,5288.95 ; v7(7084,4680) 7084.29,4679.71 U34.4@7084.29,4573.06 7084.29,4533.99 C159.2@7136.3,4481.98 ; U34.77@7084.29,5204.94 v7(7084.29,5284.71) C152.2@7084.3,5345.98 ; U34.4@7085.18,4545.5 ccw(c7115.1,4545.5) 7093.94,4524.34 ; C159.2@7127.77,4490.52 ccw(c7136.3,4499.05) C159.2@7136.3,4486.98 ; 6467.24,4452.24 cw(c6457,4462.49) 6457,4448 ccw(c6457,4462.49) 6467.24,4452.24 ; 6467.24,4452.24 ccw(c6477.49,4442) 6463,4442 cw(c6477.49,4442) 6467.24,4452.24 ; 6703.76,4456.24 cw(c6693.51,4446) 6708,4446 ccw(c6693.51,4446) 6703.76,4456.24 ; 6703.76,4456.24 ccw(c6714,4466.49) 6714,4452 cw(c6714,4466.49) 6703.76,4456.24 ; v7@6452.76,4437.76 cw(c6441.79,4426.79) 6457.3,4426.79 ccw(c6441.79,4426.79) v7@6452.76,4437.76 ; 6457.3,4428.24 cw(c6470.76,4428.24) 6461.24,4437.76 ccw(c6470.76,4428.24) 6457.3,4428.24 ; v7@6709.76,4441.76 cw(c6700.24,4432.24) 6713.7,4432.24 ccw(c6700.24,4432.24) v7@6709.76,4441.76 ; 6713.7,4430.79 cw(c6729.21,4430.79) 6718.24,4441.76 ccw(c6729.21,4430.79) 6713.7,4430.79 ; v1@6903.28,4508.28 cw(c6896,4501) 6906.3,4501 ccw(c6896,4501) v1@6903.28,4508.28 ; 6905.16,4522.31 ccw(c6917.31,4522.31) 6908.72,4513.72 cw(c6917.31,4522.31) 6905.16,4522.31 ; v7@7079.76,4675.76 cw(c7068.81,4664.81) 7084.29,4664.81 ccw(c7068.81,4664.81) v7@7079.76,4675.76 ; 7084.29,4666.22 cw(c7097.78,4666.22) 7088.24,4675.76 ccw(c7097.78,4666.22) 7084.29,4666.22
VIN+: C51.1 C52.1 L24.2 U23.30 | length 720.5
  Top Layer w10: 7093,2535 7112,2535 7136.61,2559.61 U23.30@7136.61,2624
  Top Layer w15: C52.1@6778,2582 C52.1@6779,2582
  Top Layer w23.62: L24.2@6660,2582 6756,2582 ; L24.2@6672.86,2569.14 cw(c6703.91,2538.09) 6703.91,2582 cw(c6703.91,2625.91) L24.2@6672.86,2594.86 ; C52.1@6778,2582 C52.1@6779,2583 ; C51.1@6779,2684 C52.1@6779,2583 ; 7093,2535 6924,2535 6876,2583 C52.1@6779,2583